# Altium PCB T12-4 3.0 SMT solder.PcbDoc
Units mil, origin at the board's own origin, x right, y up, seen from the top; angles counter-clockwise.
Board outline 3937.01 x 3937.01 mil, 4 copper layers (Top Layer, VCC, GND, Bottom Layer), stack 51.1 mil thick; 59 components, 52 nets, 218 pads, 0 vias.
Unrouted connection lines stored in the file: 153.
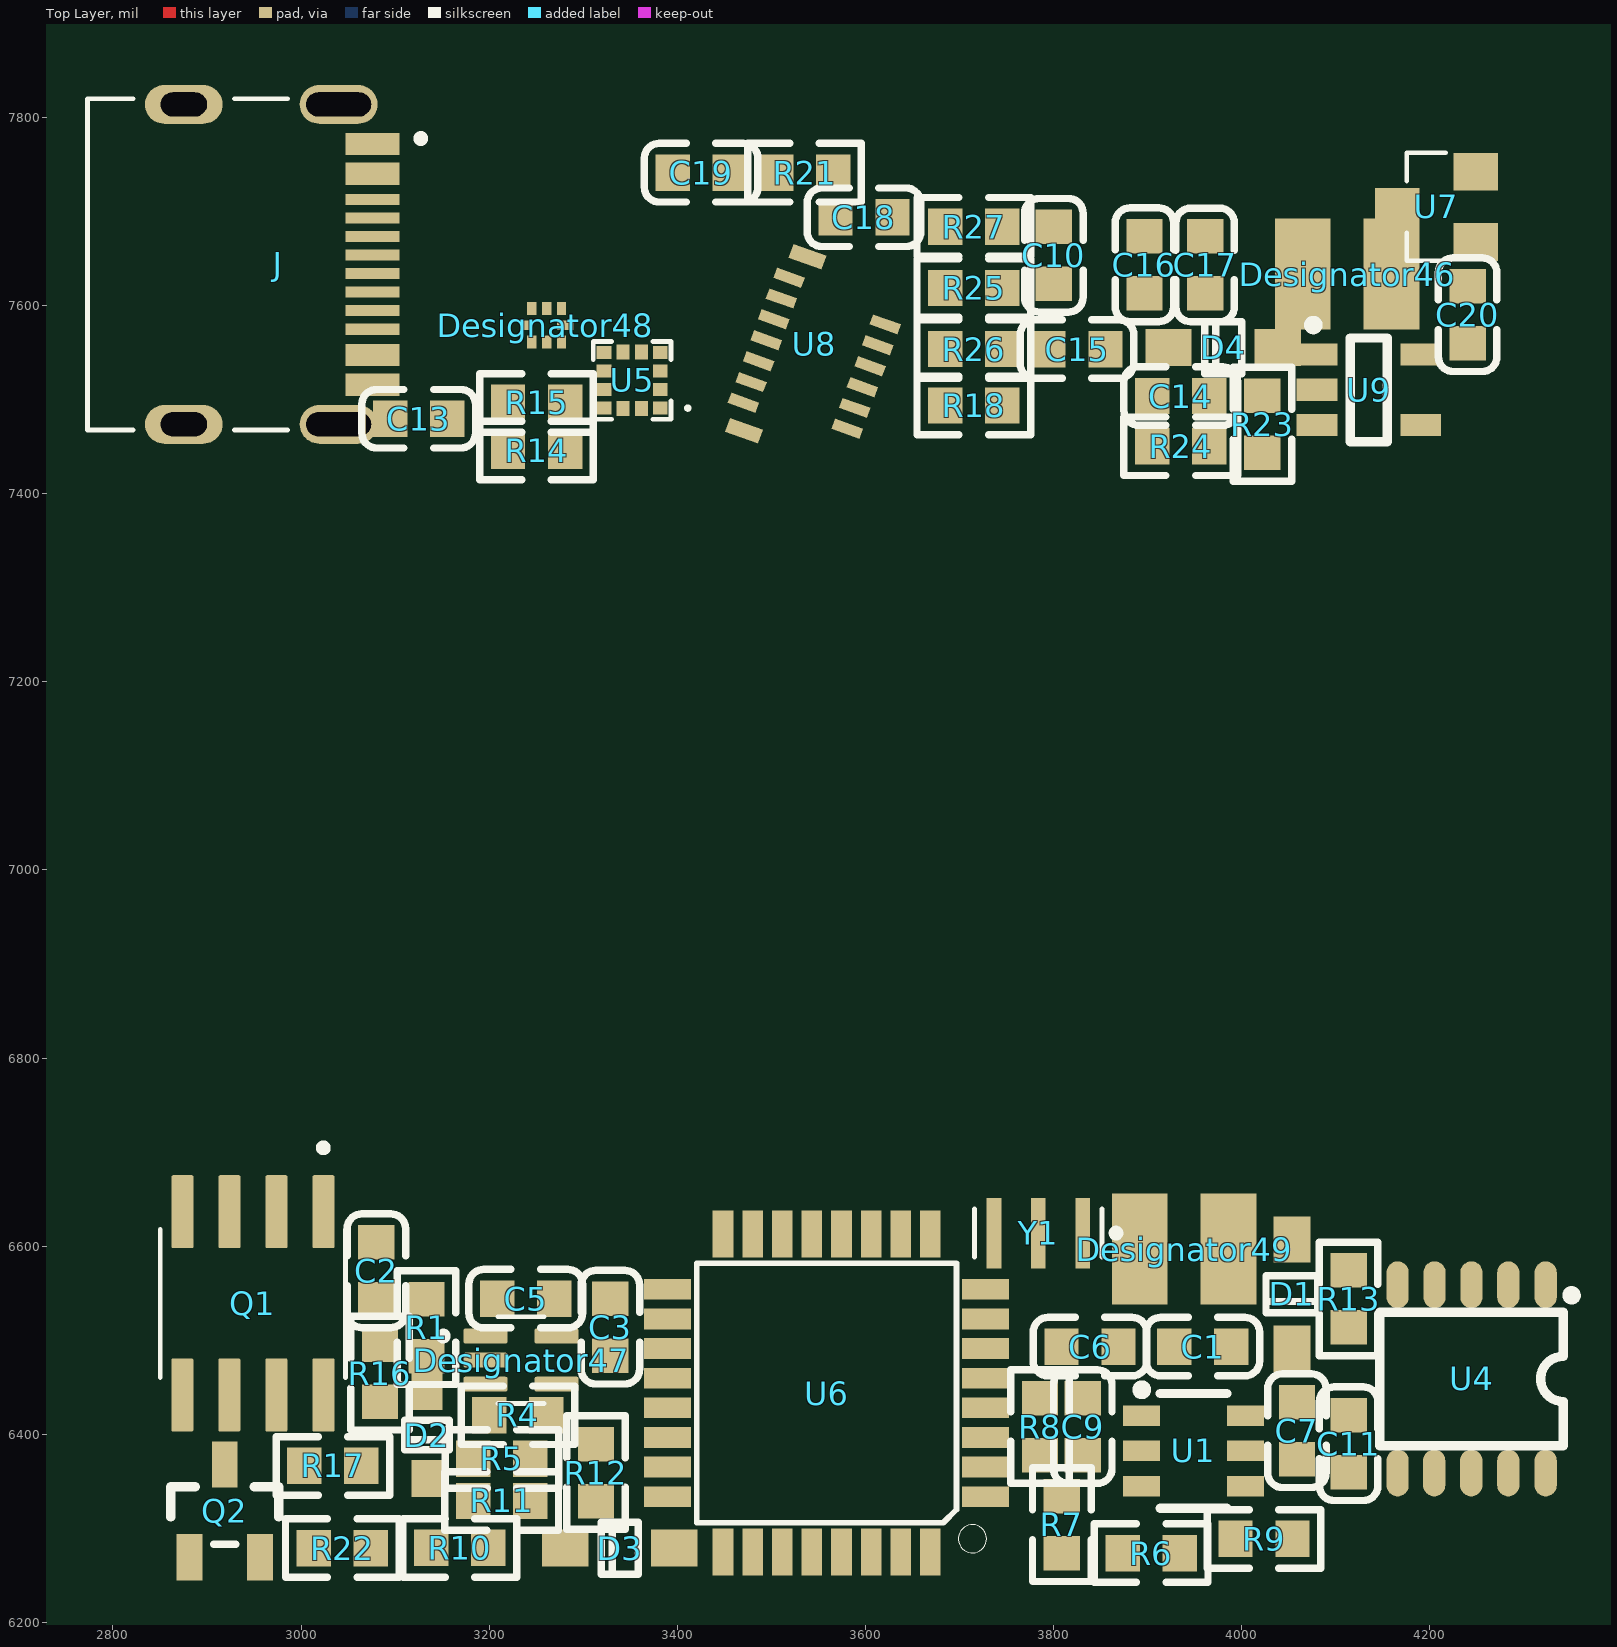
[diagram p0: Top Layer view]
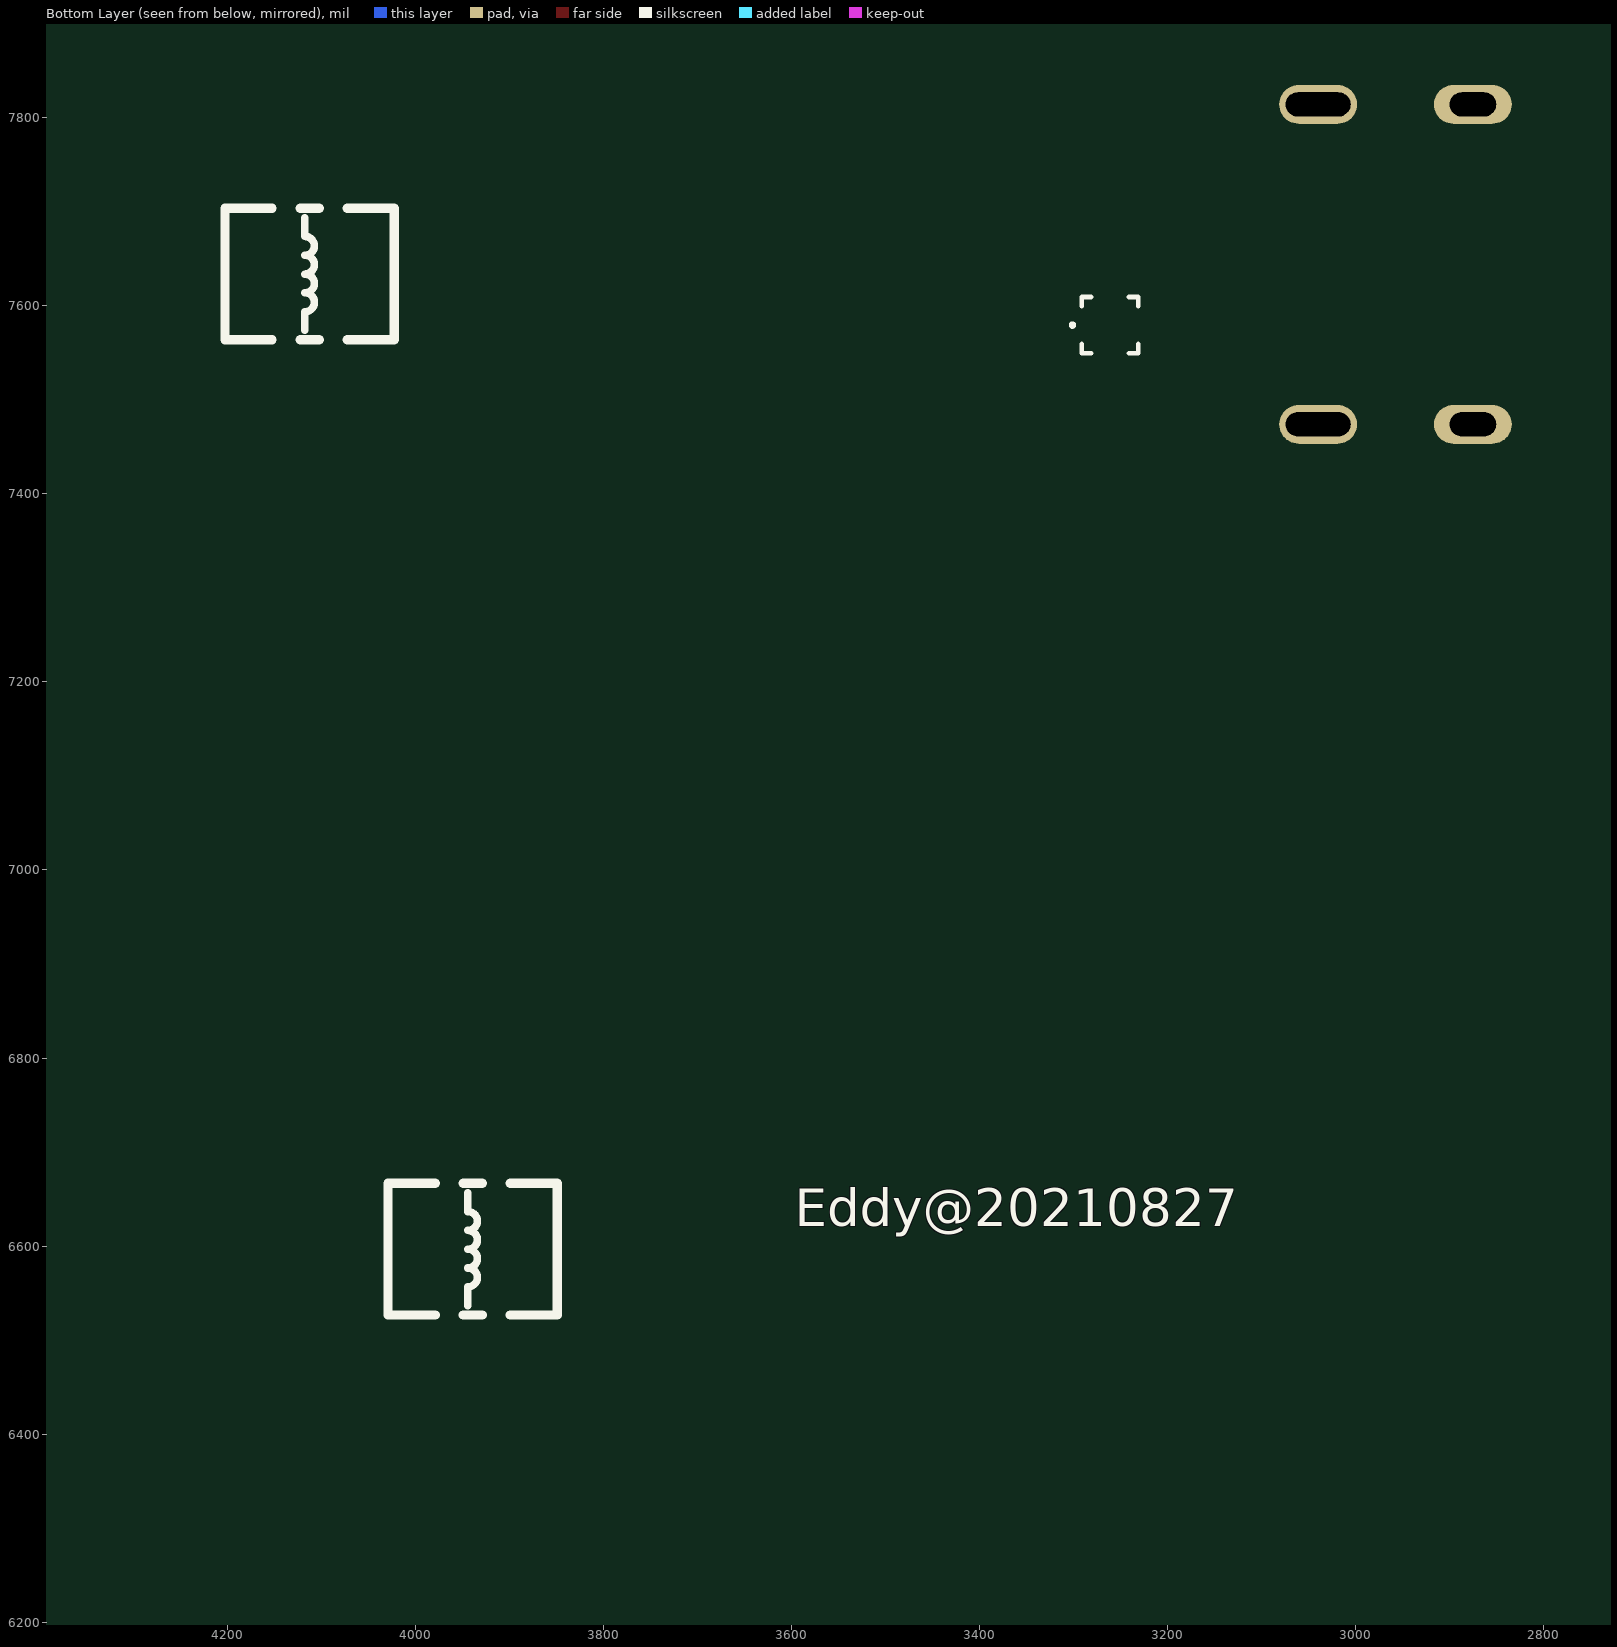
[diagram p1: Bottom Layer view, seen from below]
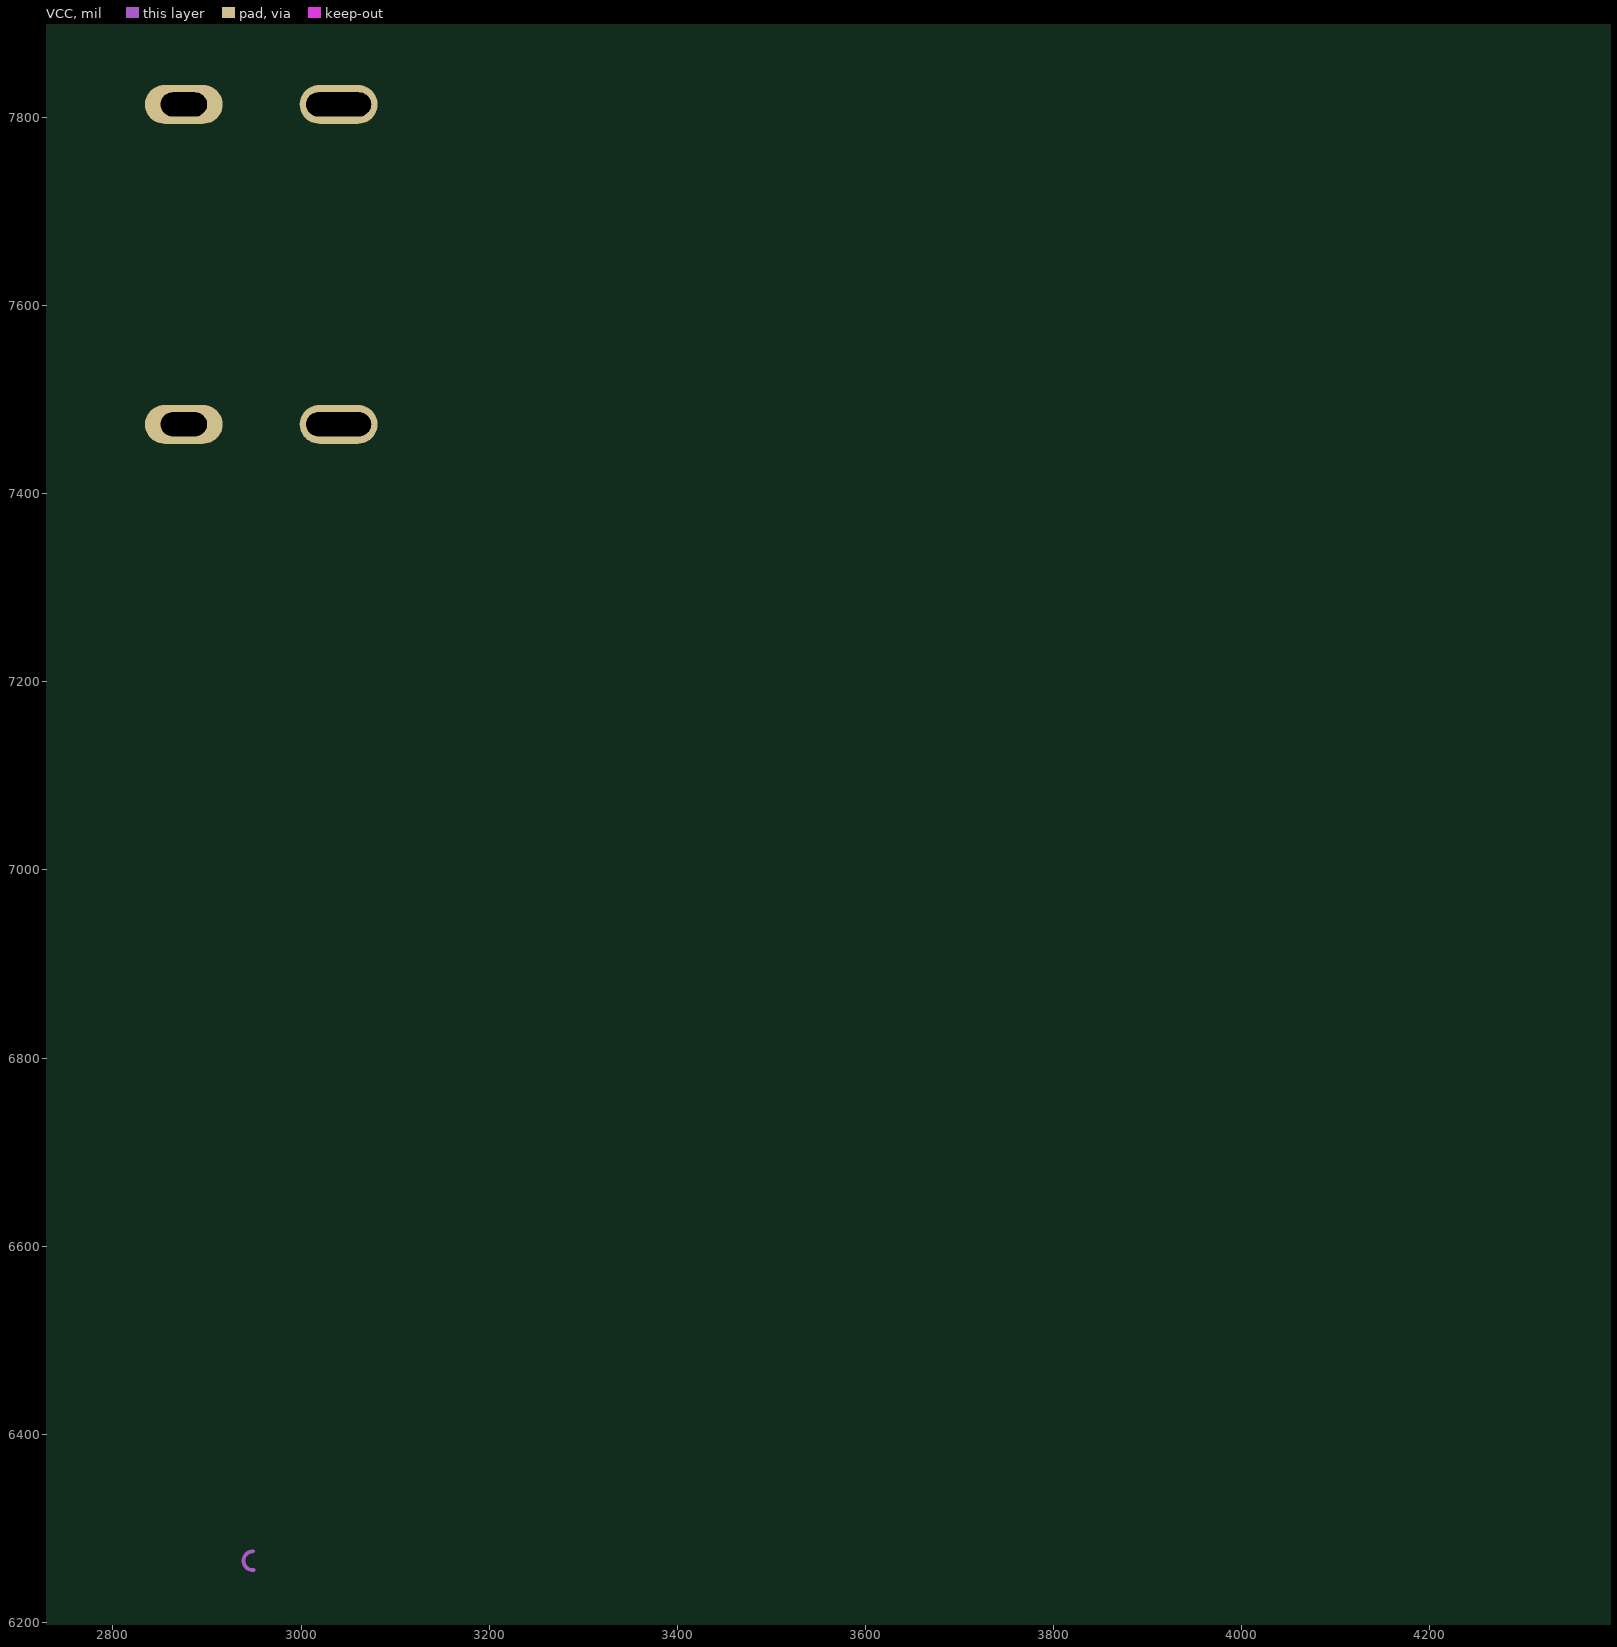
[diagram p2: VCC]
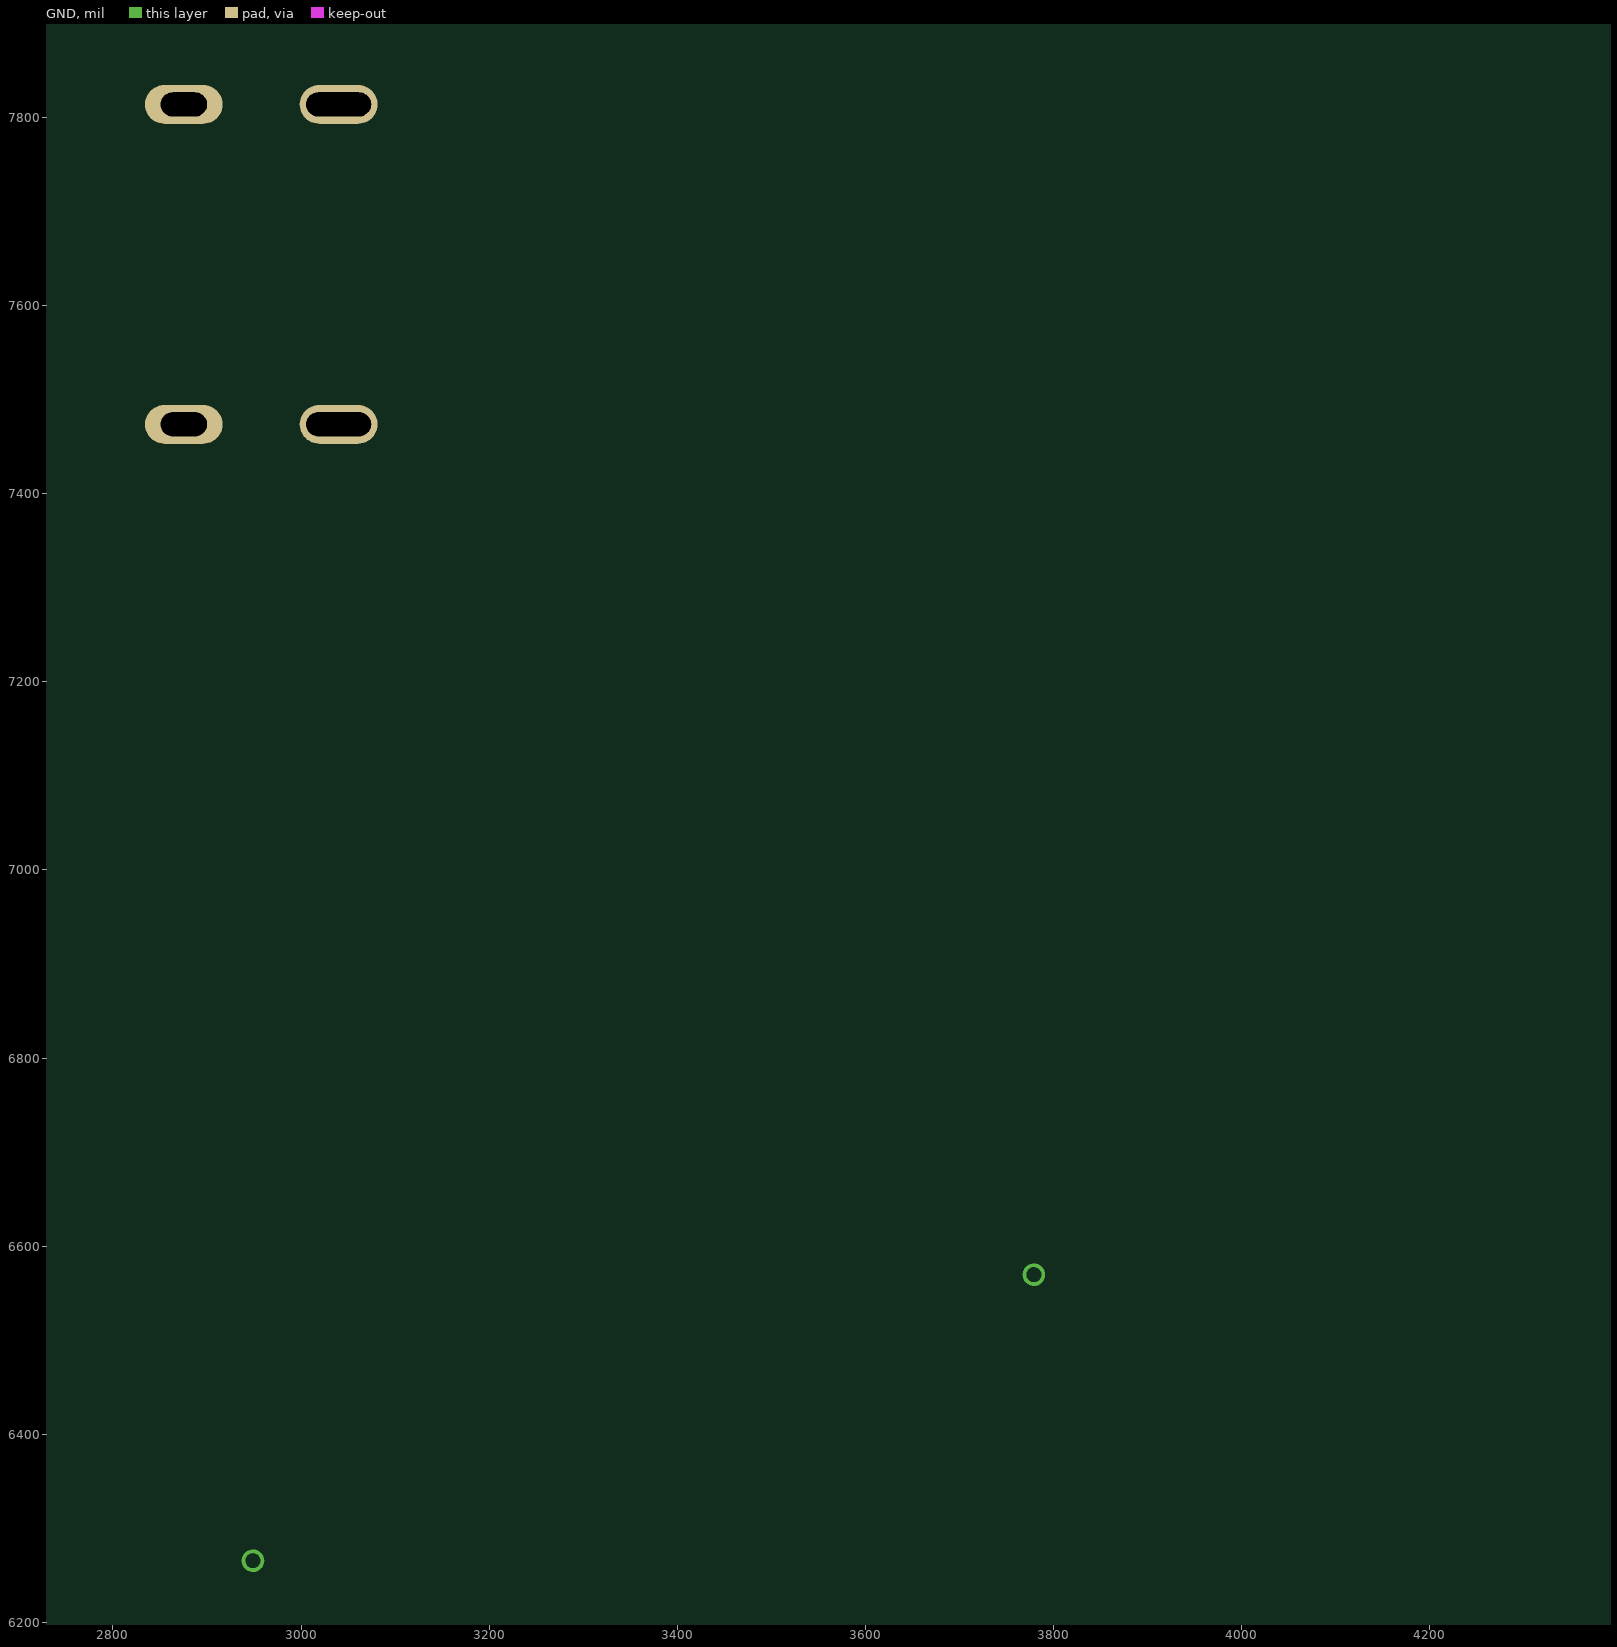
[diagram p3: GND]

## Layer stack, top to bottom
Top Solder: solder mask 0.4, Solder Resist, Dk 3.5
Top Layer: signal copper 1.3778
Dielectric 2: prepreg 4.2, PP-014, Dk 4.2
VCC: signal copper 0.4724
Dielectric 1: core 39, Core-042, Dk 4.6
GND: signal copper 0.4724
Dielectric 3: prepreg 4.2, PP-014, Dk 4.2
Bottom Layer: signal copper 1.3778
Bottom Solder: solder mask 0.4, Solder Resist, Dk 3.5

## Board outline
1575,5005 5512.01,5005 5512.01,8942.01 1575,8942.01

## Design rules (kind name [scope] priority, off if disabled: settings)
Clearance [All] p1: gap=5.3 ignorepadtopadclearanceinfootprint=FALSE except(4: Arc-Arc Arc-Track Track-Track)
ComponentClearance [All] p1: gap=0 collisioncheckmode=3 verticalgap=0 showdistances=FALSE
DiffPairsRouting [All] p1: maxlimit=10 minlimit=4 mostfreqgap=10 toplayer_minwidth=4 toplayer_maxwidth=15 toplayer_prefwidth=15 midlayer1_minwidth=4 midlayer1_maxwidth=15 midlayer1_prefwidth=15 midlayer2_minwidth=4 midlayer2_maxwidth=15 midlayer2_prefwidth=15 bottomlayer_minwidth=4 bottomlayer_maxwidth=15 bottomlayer_prefwidth=15 maxuncoupledlength=500
HoleSize [All] p1: absolutevalues=TRUE maxlimit=248.03 minlimit=7.87 maxpercent=80.000 minpercent=20.000
MinimumAnnularRing [All] p1: minimumring=4
PolygonConnect PolygonConnect_17 [All vs IsNamedPolygon('Top Layer-+5')] p1: connectstyle=Direct reliefconductorwidth=10 reliefentries=4 polygonreliefangle="90 Angle" airgapwidth=10
PolygonConnect PolygonConnect_16 [All vs IsNamedPolygon('Top Layer-NetC1_1')] p2: connectstyle=Direct reliefconductorwidth=10 reliefentries=4 polygonreliefangle="90 Angle" airgapwidth=10
PolygonConnect PolygonConnect_15 [All vs IsNamedPolygon('Top Layer-5.6v')] p3: connectstyle=Direct reliefconductorwidth=10 reliefentries=4 polygonreliefangle="90 Angle" airgapwidth=10
PolygonConnect PolygonConnect_14 [All vs IsNamedPolygon('GND-GND')] p4: connectstyle=Direct reliefconductorwidth=10 reliefentries=4 polygonreliefangle="90 Angle" airgapwidth=10
PolygonConnect PolygonConnect_13 [All vs IsNamedPolygon('Bottom Layer-P+')] p5: connectstyle=Direct reliefconductorwidth=10 reliefentries=4 polygonreliefangle="90 Angle" airgapwidth=10
PolygonConnect PolygonConnect_12 [All vs IsNamedPolygon('Top Layer-VCC 1')] p6: connectstyle=Direct reliefconductorwidth=10 reliefentries=4 polygonreliefangle="90 Angle" airgapwidth=10
PolygonConnect PolygonConnect_11 [All vs IsNamedPolygon('Top Layer-P+')] p7: connectstyle=Direct reliefconductorwidth=10 reliefentries=4 polygonreliefangle="90 Angle" airgapwidth=10
PolygonConnect PolygonConnect_10 [All vs IsNamedPolygon('Bottom Layer-VCC')] p8: connectstyle=Direct reliefconductorwidth=10 reliefentries=4 polygonreliefangle="90 Angle" airgapwidth=10
PolygonConnect PolygonConnect_9 [All vs IsNamedPolygon('Bottom Layer-GND')] p9: connectstyle=Direct reliefconductorwidth=10 reliefentries=4 polygonreliefangle="90 Angle" airgapwidth=10
PolygonConnect PolygonConnect_8 [All vs IsNamedPolygon('Top Layer-No Net')] p10: connectstyle=Direct reliefconductorwidth=10 reliefentries=4 polygonreliefangle="90 Angle" airgapwidth=10
PolygonConnect PolygonConnect_7 [All vs IsNamedPolygon('Bottom Layer-+15')] p11: connectstyle=Direct reliefconductorwidth=10 reliefentries=4 polygonreliefangle="90 Angle" airgapwidth=10
PolygonConnect PolygonConnect_6 [All vs IsNamedPolygon('Top Layer-+5 1')] p12: connectstyle=Direct reliefconductorwidth=10 reliefentries=4 polygonreliefangle="90 Angle" airgapwidth=10
PolygonConnect PolygonConnect_4 [All vs IsNamedPolygon('Top Layer-+5')] p13: connectstyle=Direct reliefconductorwidth=10 reliefentries=4 polygonreliefangle="90 Angle" airgapwidth=10
PolygonConnect PolygonConnect_5 [All vs IsNamedPolygon('Bottom Layer-+5')] p14: connectstyle=Direct reliefconductorwidth=10 reliefentries=4 polygonreliefangle="90 Angle" airgapwidth=10
PolygonConnect PolygonConnect_3 [All vs IsNamedPolygon('Top Layer-VCC')] p15: connectstyle=Direct reliefconductorwidth=10 reliefentries=4 polygonreliefangle="90 Angle" airgapwidth=10
PolygonConnect PolygonConnect_2 [All vs IsNamedPolygon('NETC1_1_L01_P024')] p16: thpad.connectstyle=Relief thpad.reliefconductorwidth=10 thpad.reliefentries=4 thpad.polygonreliefangle="90 Angle" thpad.airgapwidth=10 smdpad.connectstyle=Direct smdpad.reliefconductorwidth=10 smdpad.reliefentries=4 smdpad.polygonreliefangle="90 Angle" smdpad.airgapwidth=10 via.connectstyle=Relief via.reliefconductorwidth=10 via.reliefentries=4 via.polygonreliefangle="90 Angle" via.airgapwidth=10
PolygonConnect PolygonConnect_1 [All vs IsNamedPolygon('Top Layer-5.6v')] p17: thpad.connectstyle=Relief thpad.reliefconductorwidth=10 thpad.reliefentries=4 thpad.polygonreliefangle="90 Angle" thpad.airgapwidth=10 smdpad.connectstyle=Direct smdpad.reliefconductorwidth=10 smdpad.reliefentries=4 smdpad.polygonreliefangle="90 Angle" smdpad.airgapwidth=10 via.connectstyle=Relief via.reliefconductorwidth=10 via.reliefentries=4 via.polygonreliefangle="90 Angle" via.airgapwidth=10
PolygonConnect alll [All vs IsNamedPolygon('+5V_L01_P002') Or  IsNamedPolygon('GND-VDD33') Or  IsNamedPolygon('Top Layer-GND') Or  IsNamedPolygon('Bottom Layer-VDD33') Or  IsNamedPolygon('Top Layer-VDD33') Or  IsNamedPolygon('GND-GND') Or  IsNamedPolygon('VDD33_L02_P008') Or  IsNamedPolygon('Bottom Layer-GND') Or  IsNamedPolygon('VCC-GND')] p18: connectstyle=Direct reliefconductorwidth=10 reliefentries=4 polygonreliefangle="90 Angle" airgapwidth=10
PolygonConnect vdd3333 [All vs IsNamedPolygon('VDD33_L02_P008')] p19: connectstyle=Direct reliefconductorwidth=10 reliefentries=4 polygonreliefangle="90 Angle" airgapwidth=10
PolygonConnect all [All vs IsNamedPolygon('Top Layer-VDD33') Or  IsNamedPolygon('+5V_L01_P002') Or  IsNamedPolygon('Top Layer-GND') Or  IsNamedPolygon('Bottom Layer-VDD33') Or  IsNamedPolygon('VDD33_L02_P008') Or  IsNamedPolygon('VCC-GND') Or  IsNamedPolygon('GND-VDD33') Or  IsNamedPolygon('GND-GND') Or  IsNamedPolygon('Bottom Layer-GND')] p20: connectstyle=Direct reliefconductorwidth=10 reliefentries=4 polygonreliefangle="90 Angle" airgapwidth=10
PolygonConnect +5v_1 [All vs IsNamedPolygon('Bottom Layer-+5V')] p21: connectstyle=Direct reliefconductorwidth=10 reliefentries=4 polygonreliefangle="90 Angle" airgapwidth=10
PolygonConnect botton [All vs IsNamedPolygon('Bottom Layer-GND')] p22: thpad.connectstyle=Relief thpad.reliefconductorwidth=10 thpad.reliefentries=4 thpad.polygonreliefangle="90 Angle" thpad.airgapwidth=10 smdpad.connectstyle=Relief smdpad.reliefconductorwidth=10 smdpad.reliefentries=4 smdpad.polygonreliefangle="90 Angle" smdpad.airgapwidth=10 via.connectstyle=Direct via.reliefconductorwidth=10 via.reliefentries=4 via.polygonreliefangle="90 Angle" via.airgapwidth=10
PolygonConnect vdd_3 [All vs IsNamedPolygon('VDD33_L02_P008')] p23: thpad.connectstyle=Relief thpad.reliefconductorwidth=10 thpad.reliefentries=4 thpad.polygonreliefangle="90 Angle" thpad.airgapwidth=10 smdpad.connectstyle=Relief smdpad.reliefconductorwidth=10 smdpad.reliefentries=4 smdpad.polygonreliefangle="90 Angle" smdpad.airgapwidth=10 via.connectstyle=Direct via.reliefconductorwidth=10 via.reliefentries=4 via.polygonreliefangle="90 Angle" via.airgapwidth=10
PolygonConnect vdd_2 [All vs IsNamedPolygon('VDD33_L02_P018')] p24: thpad.connectstyle=Relief thpad.reliefconductorwidth=10 thpad.reliefentries=4 thpad.polygonreliefangle="90 Angle" thpad.airgapwidth=10 smdpad.connectstyle=Relief smdpad.reliefconductorwidth=10 smdpad.reliefentries=4 smdpad.polygonreliefangle="90 Angle" smdpad.airgapwidth=10 via.connectstyle=Direct via.reliefconductorwidth=10 via.reliefentries=4 via.polygonreliefangle="90 Angle" via.airgapwidth=10
PolygonConnect gndvdd33 [All vs IsNamedPolygon('VDD33_L02_P018')] p25: thpad.connectstyle=Relief thpad.reliefconductorwidth=10 thpad.reliefentries=4 thpad.polygonreliefangle="90 Angle" thpad.airgapwidth=10 smdpad.connectstyle=Relief smdpad.reliefconductorwidth=10 smdpad.reliefentries=4 smdpad.polygonreliefangle="90 Angle" smdpad.airgapwidth=10 via.connectstyle=Direct via.reliefconductorwidth=10 via.reliefentries=4 via.polygonreliefangle="90 Angle" via.airgapwidth=10
PolygonConnect "gnd ndd33" [All vs IsNamedPolygon('VDD33_L02_P018')] p26: thpad.connectstyle=Relief thpad.reliefconductorwidth=10 thpad.reliefentries=4 thpad.polygonreliefangle="90 Angle" thpad.airgapwidth=10 smdpad.connectstyle=Relief smdpad.reliefconductorwidth=10 smdpad.reliefentries=4 smdpad.polygonreliefangle="90 Angle" smdpad.airgapwidth=10 via.connectstyle=Direct via.reliefconductorwidth=10 via.reliefentries=4 via.polygonreliefangle="90 Angle" via.airgapwidth=10
PolygonConnect singnd [All vs IsNamedPolygon('GND-GND')] p27: thpad.connectstyle=Relief thpad.reliefconductorwidth=10 thpad.reliefentries=4 thpad.polygonreliefangle="90 Angle" thpad.airgapwidth=10 smdpad.connectstyle=Relief smdpad.reliefconductorwidth=10 smdpad.reliefentries=4 smdpad.polygonreliefangle="90 Angle" smdpad.airgapwidth=10 via.connectstyle=Direct via.reliefconductorwidth=10 via.reliefentries=4 via.polygonreliefangle="90 Angle" via.airgapwidth=10
PolygonConnect gnd [All vs IsNamedPolygon('VCC-GND')] p28: thpad.connectstyle=Relief thpad.reliefconductorwidth=10 thpad.reliefentries=4 thpad.polygonreliefangle="90 Angle" thpad.airgapwidth=10 smdpad.connectstyle=Relief smdpad.reliefconductorwidth=10 smdpad.reliefentries=4 smdpad.polygonreliefangle="90 Angle" smdpad.airgapwidth=10 via.connectstyle=Direct via.reliefconductorwidth=10 via.reliefentries=4 via.polygonreliefangle="90 Angle" via.airgapwidth=10
PolygonConnect vdd_1 [All vs IsNamedPolygon('Bottom Layer-VDD33')] p29: thpad.connectstyle=Relief thpad.reliefconductorwidth=10 thpad.reliefentries=4 thpad.polygonreliefangle="90 Angle" thpad.airgapwidth=10 smdpad.connectstyle=Relief smdpad.reliefconductorwidth=10 smdpad.reliefentries=4 smdpad.polygonreliefangle="90 Angle" smdpad.airgapwidth=10 via.connectstyle=Direct via.reliefconductorwidth=10 via.reliefentries=4 via.polygonreliefangle="90 Angle" via.airgapwidth=10
PolygonConnect topgnd [All vs IsNamedPolygon('Top Layer-GND')] p30: thpad.connectstyle=Relief thpad.reliefconductorwidth=10 thpad.reliefentries=4 thpad.polygonreliefangle="90 Angle" thpad.airgapwidth=10 smdpad.connectstyle=Relief smdpad.reliefconductorwidth=10 smdpad.reliefentries=4 smdpad.polygonreliefangle="90 Angle" smdpad.airgapwidth=10 via.connectstyle=Direct via.reliefconductorwidth=10 via.reliefentries=4 via.polygonreliefangle="90 Angle" via.airgapwidth=10
PolygonConnect vdd33 [All vs IsNamedPolygon('Top Layer-VDD33')] p31: connectstyle=Direct reliefconductorwidth=10 reliefentries=4 polygonreliefangle="90 Angle" airgapwidth=10
PolygonConnect +5v [All vs IsNamedPolygon('+5V_L01_P002')] p32: connectstyle=Direct reliefconductorwidth=10 reliefentries=4 polygonreliefangle="90 Angle" airgapwidth=10
PolygonConnect asm_1 [All vs IsNamedPolygon('Top Layer-VDD33')] p33: thpad.connectstyle=Direct thpad.reliefconductorwidth=10 thpad.reliefentries=4 thpad.polygonreliefangle="90 Angle" thpad.airgapwidth=10 smdpad.connectstyle=Direct smdpad.reliefconductorwidth=10 smdpad.reliefentries=4 smdpad.polygonreliefangle="90 Angle" smdpad.airgapwidth=10 via.connectstyle=Relief via.reliefconductorwidth=10 via.reliefentries=4 via.polygonreliefangle="90 Angle" via.airgapwidth=10
PolygonConnect asm [All vs IsNamedPolygon('Top Layer-VDD33')] p34: connectstyle=Relief reliefconductorwidth=10 reliefentries=4 polygonreliefangle="90 Angle" airgapwidth=10
PolygonConnect [All] p35: connectstyle=Relief reliefconductorwidth=10 reliefentries=4 polygonreliefangle="90 Angle" airgapwidth=10
RoutingVias [All] p1: holewidth=28 width=50 viastyle="Through Hole" minholewidth=8 minwidth=17.72 maxholewidth=50 maxwidth=80
SolderMaskExpansion [All] p1: expansion=4
Width [All] p1: maxlimit=50 minlimit=4 preferedwidth=10
27 further rules are at their usual default settings.

## Classes and differential pairs
component class T12: C1 C2 C3 C5 C6 C7 C9 C10 C11 C13 C14 C15 C16 C18 C19 D1 D2 D3 D4 J Q1 Q2 R1 R4 R5 R6 R7 R8 R9 R10 R11 R12 R13 R14 R15 R16 R17 R18 R21 R22 R23 R24 R25 R26 R27 U1 U4 U5 U6 U7 U8 U9 Y1

## Components (designator, comment, footprint, x,y, rotation, side; value= is the part's Value field where it differs from the comment)
C1 "100nF (104) 10% 50V" 0603_C 3958.86,6493.21 r180 top
C2 "1uF (105) 10% 50V" 0603_C 3080.04,6573.9 r90 top
C3 "100nF (104) 10% 50V" 0603_C 3328.86,6513.9 r90 top
C5 "2.2nF (222) 10% 50V" 0603_C 3238.86,6544.21 r0 top
C6 "10uF (106) 10% 10V" 0603_C 3838.86,6493.21 r180 top
C7 "4.7uF (475) 10% 16V" 0603_C 4058.86,6403.9 r270 top
C9 "33pF (330) 5% 50V" 0603_C 3831.1,6408.19 r270 top
C10 "100nF (104) 10% 50V" 0603_C 3800.35,7653.58 r90 top
C11 "1uF (105) 10% 50V" 0603_C 4113.86,6390 r270 top
C13 "1uF (105) 10% 50V" 0603_C 3125.04,7479.81 r180 top
C14 "10pF (100) 5% 50V" 0603_C 3935.35,7503.9 r180 top
C15 "10uF (106) 10% 10V" 0603_C 3825.04,7553.78 r0 top
C16 "10uF (106) 10% 10V" 0603_C 3896.7,7643.49 r270 top
C17 "100nF (104) 10% 50V" 0603_C 3961.26,7643.33 r90 top (schematic designator C10)
C18 "100nF (104) 10% 50V" 0603_C 3598.54,7694.01 r0 top
C19 "4.7uF (475) 10% 16V" 0603_C 3425.35,7741.4 r0 top
C20 "10uF (106) 10% 10V" 0603_C 4240.35,7590.44 r90 top (schematic designator C16)
D1 "B5819W  SL" SOD-123 4053.54,6549.01 r90 top
D2 "1N4148WS T4" SOD-323 3133.86,6399.21 r90 top
D3 "B5819W  SL" SOD-123 3338.86,6278.9 r0 top
D4 "B5819W  SL" SOD-123 3980.35,7555.37 r0 top
Designator46 "Comment" NR3015 4112.19,7633.64 r180 top
Designator47 "Comment" SOT65P210X110-5N 3233.86,6478.9 r0 top
Designator48 "Comment" FXMAR2102UMX 3261.09,7579.33 r180 top
Designator49 "Comment" NR3015 3938.86,6596.8 r180 top
J "TYPE-C-31-M-12" TYPE-C-31-M-12 2875.35,7643.9 r270 top
Q1 "AO4485" SOIC127P600X175-8N 2948.86,6539.21 r270 top
Q2 "SS8050 Y1" SOT-23(SOT-23-3) 2918.86,6318.58 r270 top
R1 "10KΩ (1002) ±1%" 0603_R 3133.46,6513.41 r90 top
R4 "200KΩ (2003) ±1%" 0603_R 3230.57,6420.23 r180 top
R5 "1KΩ (1001) ±1%" 0603_R 3213.54,6373.9 r0 top
R6 "10KΩ (1002) ±1%" 0603_R 3903.86,6273.58 r180 top
R7 "23.7KΩ (223) ±1%" 0603_R 3808.86,6303.9 r90 top
R8 "124KΩ (1243) ±1%" 0603_R 3785.79,6408.19 r270 top
R9 "22KΩ (2201) ±1%" 0603_R 4023.86,6288.82 r0 top
R10 "47KΩ (4702) ±1%" 0603_R 3168.86,6279.21 r180 top
R11 "10KΩ (1002) ±1%" 0603_R 3213.27,6329.1 r0 top
R12 "10KΩ (1002) ±1%" 0603_R 3313.52,6359.3 r270 top
R13 "180KΩ (1803) ±1%" 0603_R 4113.86,6543.9 r90 top
R14 "10KΩ (1002) ±1%" 0603_R 3250.35,7445.89 r0 top
R15 "10KΩ (1002) ±1%" 0603_R 3250.35,7496.65 r0 top
R16 "10KΩ (1002) ±1%" 0603_R 3083.86,6464.95 r90 top
R17 "4.7KΩ (4701) ±1%" 0603_R 3033.86,6366.44 r0 top
R18 "4.7KΩ (4701) ±1%" 0603_R 3715.35,7493.9 r0 top
R21 "4.7KΩ (4701) ±1%" 0603_R 3535.35,7741.4 r0 top
R22 "4.7KΩ (4701) ±1%" 0603_R 3043.86,6278.9 r180 top
R23 "100KΩ (1003) ±1%" 0603_R 4022.09,7473.9 r90 top
R24 "560KΩ (1002) ±1%" 0603_R 3935.35,7450.56 r180 top
R25 "4.7KΩ (4701) ±1%" 0603_R 3715.35,7618.9 r180 top
R26 "560KΩ (5603) ±1%" 0603_R 3715.35,7553.9 r180 top
R27 "4.7KΩ (4701) ±1%" 0603_R 3715.35,7683.9 r180 top
U1 "MP2451DT-LF-Z" SOT-23-6_L2.9-W1.6-P0.95-LS2.8-BR 3948.86,6384.33 r180 top
U4 "FS312" FS312 4248.86,6458.9 r0 top
U5 "LIS2DW12TR" LGA12R50P4X4_200X200X70 3352.09,7520.68 r180 top
U6 "MCU-ATMEGA328P-AU(TQFP32)" TQFP32-0.8-7X7MM 3558.86,6443.9 r180 top
U7 "PMIC-LDO-XC6206P332MR-G(SOT23)" SOT-23 4207.05,7705.13 r90 top
U8 "SH1107" FH35C-13S 3470.35,7496.65 r340 top
U9 "TPS61040DBVRG4" SOT-23-5 4135.35,7510.55 r180 top
Y1 "CSTCE16M0V51Z-R0" OSC_CSTCE16M0V51Z-R0 3783.86,6613.9 r180 top

## Footprints (in the part's own frame and the unit in brackets; to place one, negate y for a bottom-side part, rotate by r counter-clockwise, add the part's x,y. Pads: shape width x height; smd on the part's side, far side on the other; paste and mask are expansions set on the pad)
0603_C [mm]
  rect 0.93x0.98 smd: 1(-0.77,0) 2(0.77,0)
  silkscreen extent -1.53,-0.79 1.54,0.79, body extent -0.8,-0.4 0.8,0.4, height 0.3
0603_R [mm]
  rect 0.93x0.98 smd: 1(-0.77,0) 2(0.77,0)
  silkscreen extent -1.53,-0.79 1.54,0.79, body extent -0.85,-0.4 0.85,0.4, height 0.56
FH35C-13S [mm]
  rect 0.95x0.4 smd: 0(0.275,4.3) 0(0.275,-0.7)
  rect 0.8x0.3 smd: 1(0,3.6) 2(2.875,3.3) 3(0,3) 4(2.875,2.7) 5(0,2.4) 6(2.875,2.1) 7(0,1.8) 8(2.875,1.5) 9(0,1.2) 10(2.875,0.9) 11(0,0.6) 12(2.875,0.3) 13(0,0)
FS312 [mm]
  oval 0.6x1.27 smd: 1(1.891,2.54) 2(0.883,2.54) 3(-0.113,2.54) 4(-1.108,2.54) 5(-2.107,2.54) 6(-2.107,-2.54) 7(-1.119,-2.54) 8(-0.118,-2.54) 9(0.883,-2.54) 10(1.891,-2.54)
  silkscreen extent -2.59,-1.8 2.72,2.38
FXMAR2102UMX [mm]
  rect 0.45x0.25 smd: 1(-0.5,0)
  rect 0.25x0.35 smd: 2(-0.4,-0.45) 3(0,-0.45) 4(0.4,-0.45) 6(0.4,0.45) 7(0,0.45) 8(-0.4,0.45)
  rect 0.325x0.25 smd: 5(0.563,0)
LGA12R50P4X4_200X200X70 [mm]
  rect 0.4x0.35 smd: 1(-0.76,0.75) 2(-0.76,0.25) 3(-0.76,-0.25) 4(-0.76,-0.75) 7(0.76,-0.75) 8(0.76,-0.25) 9(0.76,0.25) 10(0.76,0.75)
  rect 0.35x0.4 smd: 5(-0.25,-0.76) 6(0.25,-0.76) 11(0.25,0.76) 12(-0.25,0.76)
  silkscreen extent -1.55,-1.05 1.05,1.05, body extent -1,-1 1,1, height 0.7
NR3015 [mm] "3mm*3mm*1.5mm(长*宽*高）"
  rect 1.5x3 smd: 1(-1.2,0) 2(1.2,0)
  body extent -1.52,-1.5 1.48,1.5, height 1.45
OSC_CSTCE16M0V51Z-R0 [mm]
  rect 0.4x1.9 smd: 1(-1.2,0) 2(0,0) 3(1.2,0)
  silkscreen extent -2.2,-0.65 1.72,0.65, body extent -1.6,-0.65 1.6,0.65, height 1
SOD-123 [mm]
  rect 1.25x1 smd: 1(1.475,0) 2(-1.475,0)
  silkscreen extent -0.5,-0.7 0.5,0.7, body extent -1.85,-0.77 1.85,0.78, height 1.35
SOD-323 [mm]
  rect 1x0.83 smd: 1(1.18,0) 2(-1.18,0)
  silkscreen extent -0.4,-0.6 0.4,0.6, body extent -1.35,-0.62 1.35,0.63, height 1.1
SOIC127P600X175-8N [mm]
  rrect15% 1.97x0.6 smd: 1(-2.475,1.905) 2(-2.475,0.635) 3(-2.475,-0.635) 4(-2.475,-1.905) 5(2.475,-1.905) 6(2.475,-0.635) 7(2.475,0.635) 8(2.475,1.905)
  silkscreen extent -4.3,-2.5 2,2.5
SOT65P210X110-5N [mm]
  rrect25% 1.19x0.4 smd: 1(-0.96,0.65) 2(-0.96,0) 3(-0.96,-0.65) 4(0.96,-0.65) 5(0.96,0.65)
  silkscreen extent -2.2,-1.17 0.63,1.17, body extent -1.05,-1 1.05,1, height 1.1
SOT-23 [mm]
  rect 1.016x1.2 smd: 1(-0.95,-1.06) 2(0.95,-1.06) 3(0,1.06)
  silkscreen extent -1.46,-0.25 1.46,0.8
SOT-23(SOT-23-3) [mm]
  rect 1.25x0.7 smd: 1(1.25,-0.95) 2(1.25,0.95) 3(-1.25,0)
  silkscreen extent -0.65,-1.46 0.9,1.46, body extent -1.5,-1.5 1.5,1.5, height 1.3
SOT-23-5 [mm]
  rect 1.1x0.6 smd: 1(1.4,-0.95) 2(1.4,0) 3(1.4,0.95) 4(-1.4,0.95) 5(-1.4,-0.95)
  silkscreen extent -0.5,-1.87 1.62,1.4
SOT-23-6_L2.9-W1.6-P0.95-LS2.8-BR [mm]
  rect 1x0.55 smd: 1(1.4,-0.899) 2(1.4,0.051) 3(1.4,1.001) 4(-1.4,1.001) 5(-1.4,0.051) 6(-1.4,-0.899)
  silkscreen extent -0.9,-1.73 1.52,1.6
TQFP32-0.8-7X7MM [mil]
  rect 50x22 smd: 1(-169,110.24) 2(-169,78.74) 3(-169,47.24) 4(-169,15.75) 5(-169,-15.75) 6(-169,-47.24) 7(-169,-78.74) 8(-169,-110.24) 17(169,-110.24) 18(169,-78.74) 19(169,-47.24) 20(169,-15.75) 21(169,15.75) 22(169,47.24) 23(169,78.74) 24(169,110.24)
  rect 22x50 smd: 9(-110.24,-169) 10(-78.74,-169) 11(-47.24,-169) 12(-15.75,-169) 13(15.75,-169) 14(47.24,-169) 15(78.74,-169) 16(110.24,-169) 25(110.24,169) 26(78.74,169) 27(47.24,169) 28(15.75,169) 29(-15.75,169) 30(-47.24,169) 31(-78.74,169) 32(-110.24,169)
  silkscreen extent -170,-138 138,170, body extent -177,-177 177,177, height 21
TYPE-C-31-M-12 [mm]
  rect 0.6x1.45 smd: A1B12(-3.25,5.095) A4B9(-2.45,5.095) B1A12(3.25,5.095) B4A9(2.45,5.095)
  rect 0.3x1.45 smd: A5(-1.25,5.095) A6(-0.25,5.095) A7(0.25,5.095) A8(1.25,5.095) B5(1.75,5.095) B6(0.75,5.095) B7(-0.75,5.095) B8(-1.75,5.095)
  oval 1.05x2.1 hole 0.65 slot 1.75 at 90 deg: S1(-4.32,4.18) S2(4.32,4.18)
  oval 1.05x2.1 hole 0.65 slot 1.25 at 90 deg: S3(-4.32,0) S4(4.32,0)
  silkscreen extent -4.47,-2.6 4.47,6.5

## Part data
C1 C3 C10 C17 C18: library part "0603 100nF (104) 10% 50V", "贴片电容", Package=0603, SuppliersPartNumber=C14663, ComponentLink1Description=供?, ComponentLink1URL=http://www.szlcsc.com/product/details_15331.html, Supplier=LC
C2 C11 C13: library part "0603 1uF (105) 10% 50V", "贴片电容", Package=0603, SuppliersPartNumber=C15849, ComponentLink1Description=供?, ComponentLink1URL=http://www.szlcsc.com/product/details_16531.html, Supplier=LC
C5: library part "0603 2.2nF (222) 10% 50V", "贴片电容", Package=0603, SuppliersPartNumber=C1604, ComponentLink1Description=供?, ComponentLink1URL=http://www.szlcsc.com/product/details_1956.html, Supplier=LC
C6 C15 C16 C20: library part "0603 10uF (106) 10% 10V", "贴片电容", Package=0603, SuppliersPartNumber=C19702, ComponentLink1Description=供?, ComponentLink1URL=http://www.szlcsc.com/product/details_20411.html, Supplier=LC
C7 C19: library part "0603 4.7uF (475) 10% 16V", "贴片电容", Package=0603, SuppliersPartNumber=C19666, ComponentLink1Description=供?, ComponentLink1URL=http://www.szlcsc.com/product/details_20375.html, Supplier=LC
C9: library part "0603 33pF (330) 5% 50V", "贴片电容", Package=0603, SuppliersPartNumber=C1663, ComponentLink1Description=供?, ComponentLink1URL=http://www.szlcsc.com/product/details_2015.html, Supplier=LC
C14: library part "0603 10pF (100) 5% 50V", "贴片电容", Package=0603, SuppliersPartNumber=C1634, ComponentLink1Description=供?, ComponentLink1URL=http://www.szlcsc.com/product/details_1986.html, Supplier=LC
D1 D3 D4: library part "SOD-123 B5819W  SL", "肖特基二极管", Package=SOD-123, SuppliersPartNumber=C8598, ComponentLink1Description=供?, ComponentLink1URL=http://www.szlcsc.com/product/details_9093.html, Supplier=LC
D2: library part "SOD-323 1N4148WS T4", "二极管", Package=SOD-323, SuppliersPartNumber=C2128, ComponentLink1Description=供?, ComponentLink1URL=http://www.szlcsc.com/product/details_2485.html, Supplier=LC
J: "USB Connectors 24 Receptacle 1 8.94*7.3mm RoHS", Package=Package, Availability=Unavailable, BuyPart=https://www.snapeda.com/parts/TYPE-C-31-M-12/HRO%20Electronics%20Co.,%20Ltd./view-part/3228496/?ref=eda, MF="HRO Electronics Co., Ltd.", MP=TYPE-C-31-M-12, Price=None, SnapEDA_Link=https://www.snapeda.com/parts/TYPE-C-31-M-12/HRO%20Electronics%20Co.,%20Ltd./view-part/3228496/?ref=snap
Q1: "Transistor: P-MOSFET; unipolar; -40V; -8A; 1.1W; SO8", Package=None, Availability=Unavailable, MF="{'manufacturer': u'Alpha '}", MP=AO4485, Price=None
Q2: library part "SOT-23 SS8050 Y1", "三极管", Package=SOT-23, SuppliersPartNumber=C2150, ComponentLink1Description=供?, ComponentLink1URL=http://www.szlcsc.com/product/details_2507.html, Supplier=LC
R1 R6 R7 R11 R12 R14 R15 R16 R24: library part "0603 10KΩ (1002) 1%", "贴片电阻", Package=0603, SuppliersPartNumber=C25804, ComponentLink1Description=供?, ComponentLink1URL=http://www.szlcsc.com/product/details_26547.html, Supplier=LC
R4: library part "0603 200KΩ (2003) 1%", "贴片电阻", Package=0603, SuppliersPartNumber=C25811, ComponentLink1Description=供?, ComponentLink1URL=http://www.szlcsc.com/product/details_26554.html, Supplier=LC
R5: library part "0603 1KΩ (1001) 1%", "贴片电阻", Package=0603, SuppliersPartNumber=C21190, ComponentLink1Description=供?, ComponentLink1URL=http://www.szlcsc.com/product/details_21904.html, Supplier=LC
R8: library part "0603 62KΩ (6202) 1%", "贴片电阻", Package=0603, SuppliersPartNumber=C23221, ComponentLink1Description=供?, ComponentLink1URL=http://www.szlcsc.com/product/details_23948.html, Supplier=LC
R9: library part "0603 2.2KΩ (2201) 1%", "贴片电阻", Package=0603, SuppliersPartNumber=C4190, ComponentLink1Description=供?, ComponentLink1URL=http://www.szlcsc.com/product/details_4597.html, Supplier=LC
R10: library part "0603 47KΩ (4702) 1%", "贴片电阻", Package=0603, SuppliersPartNumber=C25819, ComponentLink1Description=供?, ComponentLink1URL=http://www.szlcsc.com/product/details_26562.html, Supplier=LC
R13: library part "0603 180KΩ (1803) 1%", "贴片电阻", Package=0603, SuppliersPartNumber=C22827, ComponentLink1Description=供?, ComponentLink1URL=http://www.szlcsc.com/product/details_23554.html, Supplier=LC
R17 R18 R21 R22 R25 R27: library part "0603 4.7KΩ (4701) 1%", "贴片电阻", Package=0603, SuppliersPartNumber=C23162, ComponentLink1Description=供?, ComponentLink1URL=http://www.szlcsc.com/product/details_23889.html, Supplier=LC
R23: library part "0603 100KΩ (1003) 1%", "贴片电阻", Package=0603, SuppliersPartNumber=C25803, ComponentLink1Description=供?, ComponentLink1URL=http://www.szlcsc.com/product/details_26546.html, Supplier=LC
R26: library part "0603 560KΩ (5603) 1%", "贴片电阻", Package=0603, SuppliersPartNumber=C23203, ComponentLink1Description=供?, ComponentLink1URL=http://www.szlcsc.com/product/details_23930.html, Supplier=LC
U1 U4 U8: Package=None, Availability=Unavailable, MF="{'manufacturer': u'Texas Instruments'}", MP=LP2985AIM5-5.0, Price=None
U5: "Mems Digital Output Motion Sensor", Package=None, Availability=Unavailable, MF="{'manufacturer': u'STMicroelectronics'}", MP=LIS2DW12TR, Price=None
U6: "310010049", Package=None, Availability=Unavailable, MF="{'manufacturer': u'Microchip Technology'}", MP=ATMEGA328P-AU, Price=None
U7: "310030099", Package=None, Availability=Unavailable, MF="{'manufacturer': u'Torex'}", MP=PMIC-LDO-XC6206P332MR-G(SOT23), Price=None
U9: library part TPS61040DBVRG4_[C7722], "DC-DCоƬ", Package=SOT-23-5, SuppliersPartNumber=C7722, ComponentLink1Description=供?, ComponentLink1URL=http://www.szlcsc.com/product/details_8199.html, Supplier=LC
Y1: "20MHz Ceramic Resonator Built in Capacitor 15pF +/- 0.2% -40C - 125C Surface Mount", Package=None, Availability=Unavailable, MF="{'manufacturer': u'Murata'}", MP=CSTCE16M0V51Z-R0, Price=None

## Nets (pads, with @x,y where several pads share a name; then routed paths per layer and width w, separated by ;. In a path a pad name is that pad's centre, name@x,y a point inside that pad or via, vN(x,y) a via of type N, cw(c..) or ccw(c..) an arc to the next point about the centre after c; other vN are vias at no path point)
5.6v: 
+3.3v: C13.1 C16.2 C17.1 C18.2 Designator48.8 R14.2 R15.2 R18.2 R21.2 U5.2 U5.9 U5.10 U7.2 U8.4
+5: C3.2 C6.2 C9.1 C20.2 Designator46.1 Designator47.5 Designator48.1 Designator48.5 Designator49.2 R8.1 R12.1 U6.4 U6.6 U6.18 U7.3 U9.4 U9.5
+15: C14.2 C15.2 D4.2 R24.2 U8.2
ADC0: Designator47.4 R4.1 U6.23
ADC1: D3.2 R10.1 R11.2 U6.24
be: U6.9
CC1: J.A5 U4.1
CC2: J.B5 U4.10
D6: U6.10
D7: U6.11
D8: U6.12
D9: R22.1 U6.13
DN: J.A7 J.B7 U4.9
DP: J.A6 J.B6 U4.8
GND: C2.2 C3.1 C5.2 C6.1 C7.1 C10.2 C11.1 C13.2 C15.1 C16.1 C17.2 C18.1 C19.1 C20.1 D1.1 D2.2 D3.1 Designator47.2 Designator48.4 J.A1B12 J.B1A12 J.S1 J.S2 J.S3 J.S4 Q2.2 R5.2 R7.1 R9.2 R11.1 R13.2 R23.2 R25.1 R26.1 R27.1 U1.2 U4.4 U5.3 U5.6 U5.7 U5.8 U6.3 U6.5 U6.21 U7.1 U8.0 U8.12 U9.2 Y1.2
INT1: U5.12 U6.32
isp-d10: 
isp-d11: U6.15
isp-d12: U6.16
isp-d13: U6.17
lcdRES: 
NetC1_1: C1.1 D1.2 Designator49.1 U1.6
NetC1_2: C1.2 U1.1
NetC5_1: C5.1 D2.1 Designator47.1 R1.1
NetC8_1: 
NetC9_2: C9.2 R7.2 R8.2 U1.3
NetC10_1: C10.1 U6.20
NetC11_2: C11.2 U4.3 U4.5 U4.6
NetC14_1: C14.1 R23.1 R24.1 U9.3
NetC19_2: C19.2 U8.3
NetD4_1: D4.1 Designator46.2 U9.1
NetQ1_4: Q1.4 R16.1 R17.2
NetQ2_1: Q2.1 R22.2
NetQ2_3: Q2.3 R17.1
NetR2_2: 
NetR4_2: Designator47.3 R4.2 R5.1
NETR6_1: R6.1 R9.1 U1.4
NetR13_1: R13.1 U4.7
NetR18_1: R18.1 U6.26 U8.8
NetR21_1: R21.1 U8.5
NetR25_2: R25.2 U8.9
NetR26_2: R26.2 U8.6
NetR27_2: R27.2 U8.7
NetU3_6: 
NetU6_7: U6.7 Y1.1
NetU6_8: U6.8 Y1.3
P+: C2.1 Q1.5 Q1.6 Q1.7 Q1.8 R1.2
RES: R12.2 U6.29
SCL: Designator48.2 Designator48.7 R14.1 U5.1 U6.28 U8.10
SDA: Designator48.3 Designator48.6 R15.1 U5.4 U6.27 U8.11
VCC: C7.2 J.A4B9 J.B4A9 Q1.1 Q1.2 Q1.3 R6.2 R10.2 R16.2 U1.5 U4.2
pads on no net: J.A8 J.B8 U5.5 U5.11 U6.1 U6.2 U6.14 U6.19 U6.22 U6.25 U6.30 U6.31 U8.1 U8.13
copper on no net: | length 157.7
  VCC w4: 2948.86,6275.56 ccw(c2948.86,6265.56) 2949.53,6255.58
  GND w4: 2958.86,6265.56 ccw(c2948.86,6265.56) 2958.86,6265.56 ; 3789.17,6569.69 ccw(c3779.17,6569.69) 3789.17,6569.69

## Silkscreen, mask and mechanical layers (free items; w line width, h text height)
Bottom Overlay:
  text "Eddy@20210827" at 3596.42,6621.13 h40
Mechanical 1:
  the board outline again, w10